# Altium PCB one.PcbDoc (part 2 of 2)
Units mil, origin at the board's own origin, x right, y up, seen from the top; angles counter-clockwise.
Board outline 6000 x 4000 mil, 4 copper layers (Top Layer, Layer 1, Layer 2, Bottom Layer), stack 23.756 mil thick; 90 components, 158 nets, 637 pads, 325 vias.
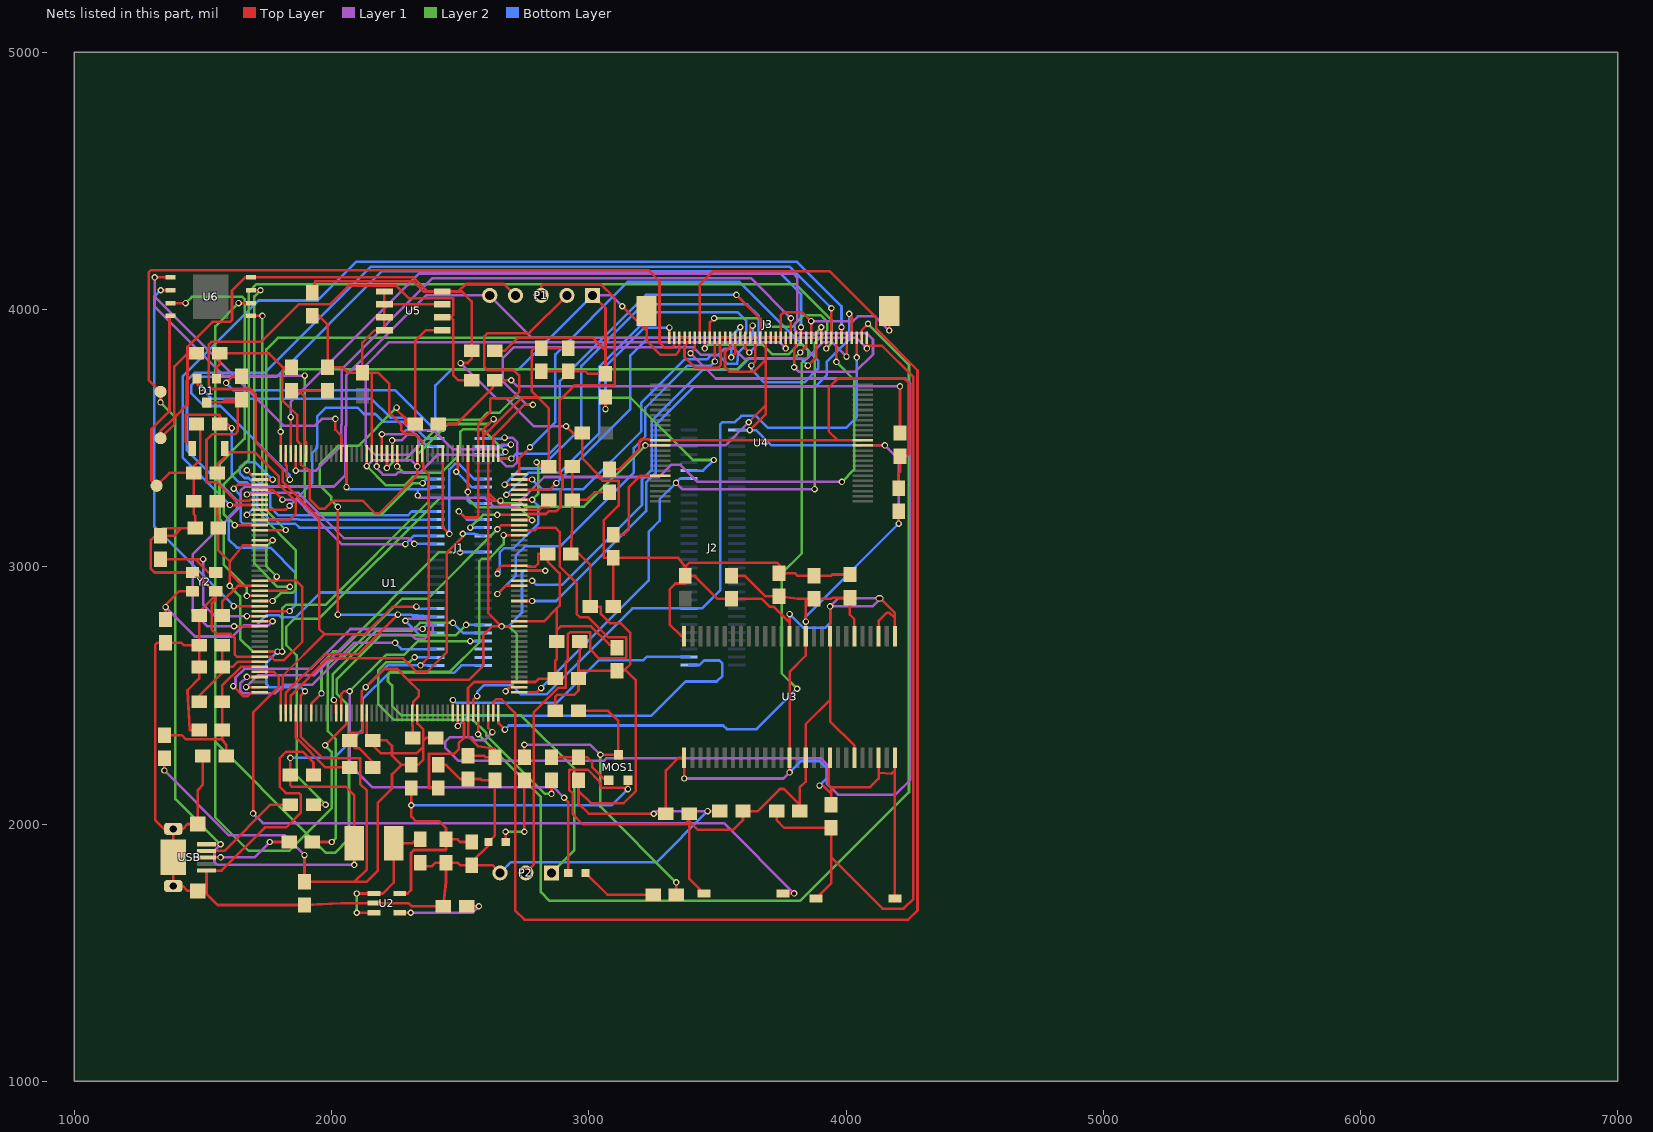
[diagram p4: the nets of this part, all layers, seen from the top]

## Via types
v1: diameter 25, hole 15, Top Layer to Bottom Layer, 325 vias

## Nets (pads, with @x,y where several pads share a name; then routed paths per layer and width w, separated by ;. In a path a pad name is that pad's centre, name@x,y a point inside that pad or via, vN(x,y) a via of type N, cw(c..) or ccw(c..) an arc to the next point about the centre after c; other vN are vias at no path point) (continued)
GND: C1.2 C2.1 C3.2 C4.1 C5.2 C6.1 C7.1 C8.1 C9.1 C10.1 C11.1 C12.2 C13.1 C14.1 C15.1 C16.1 C17.1 C18.1 C19.1 C20.1 C21.1 C22.1 C23.1 C24.1 C25.1 C26.1 C27.1 C28.1 C29.1 C30.1 C31.1 C32.1 C33.2 C34.2 C35.1 C36.1 C37.1 C38.1 C39.1 C40.1 C41.1 C42.1 C43.1 C44.2 C45.2 GND.1 J1.1 J1.30 J2.31 J3.3 J3.4 J3.5 J3.11 J3.12 J3.13 J3.20 J3.21 J3.22 J3.23 J3.29 J3.A J3.B P1.1 P2.3 PWR.2 R1.2 R4.2 R7.2 R14.1 RST.2 U1.14 U1.22 U1.37 U1.61 U1.71 U1.90 U1.102 U1.113 U1.126 U1.135 U1.148 U1.158 U2.2 U3.6 U3.12 U3.28 U3.41 U3.46 U3.52 U3.54 U4.13 U4.36 U5.1 U5.2 U5.3 U5.4 U5.7 U6.4 USB.5 USB.6 USB.7 USB.8 USB.9 Y2.2 Y2.4 | length 30651.5
  Top Layer w10: C11.1@1334.94,3120 1387,3120 1417,3150 ; U6.4@1373.5,3975 1370,3975 1370,3605 1300,3535 1300,3335 GND.1@1320,3315 1370,3365 C9.1@1465,3365 ; C8.1@1475,3554.94 1475,3550.22 1489,3550.22 1489,3412 1485,3412 1465,3392 C9.1@1465,3365 ; C7.1@1485,2365 1448,2365 1440,2520 1485,2565 C4.1@1485,2610.98 C2.1@1485,2695 ; C6.1@1500,2265 1500,2153 1480,2133 USB.9@1480,2000 1440.78,2000 1422,1981.22 USB.6@1384.65,1981.22 ; v1(1590,3715) 1615,3740 C1.2@1650,3740 ; U1.22@1720.91,2945.59 1771,2945.59 ; U1.14@1720.91,3103.07 1770.93,3103.07 v1(1771,3103) ; v1(1787,2961.59) 1771,2945.59 ; C44.2@1925,3975 1952,3975 1985,3942 R4.2@1985,3775 2042,3775 2062,3755 R7.2@2120,3755 ; C33.2@1930,2190 1930,2239 1888,2281 1824,2281 1799,2256 1799,2144 1823,2120 1873,2120 1881,2112 1881,2044 1824,1987 1741,1987 1572.82,1818.82 USB.5@1514,1818.82 1514,1740 ; U1.158@2156.56,3440.29 2156.56,3754.44 2156,3755 ; R1.2@2160,2220 2160,2241.97 2108,2293.96 2093.04,2293.96 2070,2317 C16.1@2070,2325 2070,2355 2119,2355 2120.87,2356.87 2120.87,2399 2117.19,2399 U1.61@2117.19,2431.2 2117.19,2516 v1(2133.19,2532) 2203.69,2602.5 2256,2602.5 2297.9,2560.6 ; U5.1@2205.59,4070 U5.2@2205.59,4020 ; C17.1@2315,2335 2315,2382 2314.04,2382.96 U1.71@2314.04,2431.2 2314.04,2460 2317,2460 2317,2474.68 2338.5,2496.18 2338.5,2520 2297.9,2560.6 ; C29.1@2345,1850 2345,1836.5 2390.66,1836.5 2404.16,1850 C31.1@2445,1850 ; v1(2346,2616.54) 2378,2648.54 2378,3359.38 2357.38,3380 2357.38,3400.62 2353.41,3404.59 U1.148@2353.41,3440.29 2353.41,3484.59 2322,3516 2286,3516 2271.45,3530.55 2271.45,3552 2224,3599.45 2224,3712 2181,3755 2156,3755 ; C3.2@2415.06,2230 2445,2230 2500,2175 C18.1@2530.06,2175 2580,2175 2585,2170 C19.1@2635,2170 2635,1955 PWR.2@2610,1930 2610,1917 2545,1852 C32.1@2545,1840 ; U5.7@2430,4020 U5.2@2205.59,4020 ; U1.135@2609.31,3440.29 2609.31,3287.55 ; C45.2@2635,3840 2674,3840 2725,3891 3013.94,3891 3064.94,3840 ; v1@2648.43,3248.43 2656,3240.87 ; P2.3@2655,1810 2625,1840 C32.1@2545,1840 ; 2657,3240.87 U1.126@2730,3240.87 ; v1(2657,3257) 2639.87,3257 ; v1(2677,2516) 2693.2,2532.2 U1.90@2730,2532.2 ; U1.102@2730,2768.42 v1(2661.12,2768.42) ; U1.113@2730,2984.96 2757.48,2984.96 2757.94,2984.5 v1(2831,2984.5) ; C25.1@2815.06,3760 C24.1@2920,3760 2987,3760 2997,3750 C28.1@3064.94,3750 3064.94,3840 ; C34.2@2870,2440 2870,2495 2878,2503 2944,2503 2960,2519 C20.1@2960,2565 2960,2595 ; C23.1@2935,3390.06 C5.2@2935,3260 ; R14.1@2960,2170 2960,2129 ; C21.1@2965,2710.06 2965,2640 2960,2635 2960,2595 ; P1.1@3015,4055 3064.94,4005.06 3064.94,3840 ; C36.1@3080,3289.37 3021.37,3289.37 2992,3260 C5.2@2935,3260 ; v1(3130,4013) 3224.61,3918.39 ; v1(3220,3472) 3220.43,3471.57 U4.13@3277.6,3471.57 ; J3.A@3224.61,3994.43 3224.61,3918.39 ; v1(3371.06,2177) U3.28@3371.06,2257.56 3349.56,2257.56 3300,2208 C38.1@3300,2040 v1(3252.5,2040) 3000,2040 2960,2080 2960,2129 ; v1(3462,2050) C37.1@3509.53,2050 ; C40.1@3555,2965 3607,2965 3687,2885 C41.1@3740.04,2885 3812,2875 3844,2875 ; v1(3622,3562) 3687.2,3627.2 ; v1(3626,3531.46) 3687.2,3592.66 3687.2,3627.2 ; v1(3780.51,2200.69) U3.41@3780.51,2257.56 3780.51,2591.51 3843.5,2654.5 U3.12@3843.5,2730 3843.5,2875 ; v1(3844,2787) 3844,2875 ; J3.29@3864.37,3890 v1(3864.37,3955) 3829.87,3989.5 3759.63,3989.5 3746.26,3976.13 J3.23@3746.26,3890 J3.22@3726.57,3890 J3.21@3706.89,3890 J3.20@3687.2,3890 3687.2,3803.41 ; v1(3897,2149) 3911.09,2149 3942.09,2118 ; U3.46@3937.99,2257.56 3937.99,2222.09 3932.89,2222.09 3932.89,2152.29 ; C12.2@3942.09,2075 3942.09,2118 ; U3.6@4032.48,2730 4032.48,2796 4015.06,2813.42 C43.1@4015.06,2880 3947,2880 3942,2875 C42.1@3875,2875 3844,2875 ; U4.36@4065,3471.57 v1(4151,3471.57) ; U3.52@4126.97,2257.56 4126.97,2198.83 ; v1(4168,3918.49) 4168.49,3918.97 J3.B@4168.49,3994.43 ; RST.2@4190,1710 4189.96,2208 ; U3.54@4189.96,2257.56 4189.96,2208 ; v1(4205,3168) C35.1@4205,3215 ; USB.6@1384.65,1981.22 1348.78,1981.22 1314,2016 1314,2696 1323,2705 C10.1@1355,2705 1415,2705 1425,2695 C2.1@1485,2695 ; USB.6@1384.65,1981.22 1384.65,1925.35 1385,1925 USB.9@1385,1870 1385,1814.35 1384.65,1814 USB.7@1384.65,1758.78 1422,1758.78 1440.78,1740 USB.8@1480,1740 1514,1740 ; 1417,3150 C14.1@1470,3150 1470,3199 1464.94,3204.06 C13.1@1464.94,3254.94 1464.94,3309 1465,3309.06 C9.1@1465,3365 ; 1417,3150 1344,3150 1298,3104 1298,2991.83 1312,2977.83 Y2.4@1459.45,2977.83 1468,2977.83 1540.83,2905 Y2.2@1550,2905 Y2.2@1550,2890 ; C2.1@1485,2695 C15.1@1485,2810 1485,2825 Y2.2@1550,2890 ; 1514,1740 1514,1728 1557,1685 C27.1@1895,1685 2037.4,1692.4 U2.2@2165,1692.4 2300,1692.4 2312.4,1680 C30.1@2435,1680 2445,1775 C31.1@2445,1850 ; Y2.2@1550,2890 1550,2872 1534,2856 1534,2757 1552,2739 1608,2739 1623.65,2723.35 1623.65,2658.54 1632,2650.18 1674.37,2650.18 1674.5,2650.31 U1.37@1720.91,2650.31 1765,2650.31 1779.31,2636 1814,2636 1886.5,2708.5 1886.5,2920.93 1859.28,2948.15 1787.45,2946.07 1771,2945.59 ; R7.2@2120,3755 2156,3755 ; R7.2@2120,3755 2120,3872 2168,3920 U5.4@2205.59,3920 U5.3@2205.59,3970 U5.2@2205.59,4020 ; 2297.9,2560.6 2533.6,2560.6 2590,2617 2590,2734.42 2624,2768.42 v1(2661.12,2768.42) ; C31.1@2445,1850 2490,1850 2500,1840 C32.1@2545,1840 ; 2609.31,3271.69 2609.31,3287.55 ; 2609.31,3271.69 2609.31,2820.24 v1(2661.12,2768.42) ; 2609.31,3271.69 2624,3257 2639.87,3257 ; 2609.31,3287.55 2639.87,3257 ; C5.2@2935,3260 2935,3160 C22.1@2930,3050 2963,3050 3005,3008 C39.1@3005,2845 3047.17,2845 3047.17,2816 3082.17,2781 3123,2781 3162,2742 3162,2621 3141.5,2600.5 ; 2960,2129 3008,2081 3136,2081 3182,2127 3182,2560 3141.5,2600.5 ; 2960,2595 C26.1@3110,2595 ; C26.1@3110,2595 3135.23,2599.41 3141.5,2600.5 ; C26.1@3110,2595 3136,2595 3141.5,2600.5 ; 3224.61,3918.39 3224.61,3879.07 3279.67,3824 3336.56,3824 3352.56,3840 J3.3@3352.56,3890 J3.4@3372.24,3890 J3.5@3391.93,3890 3391.93,3871 3384,3871 3372.11,3859.11 3372.11,3815.89 3413.52,3774.48 3504.34,3774.48 3513.85,3784 3513.85,3833.18 3510.04,3837 J3.11@3510.04,3890 J3.12@3529.72,3890 J3.13@3549.41,3890 3549.41,3855.47 3529.59,3835.66 3529.59,3776 3547.11,3758.48 3642.28,3758.48 3687.2,3803.41 ; 3687.2,3627.2 3687.2,3803.41 ; 3932.89,2152.29 3932.89,2152 3941.8,2143.09 3942.09,2143.09 ; 3932.89,2152.29 3942.09,2143.09 ; 3942.09,2118 3942.09,2143.09 ; 3942.09,2143.09 4094.06,2143.09 4126.97,2176 4126.97,2198.83 ; 4126.97,2198.83 4177.71,2195.75 4189.96,2208
  Layer 1 w10: P1.1@3015,4055 3088,4055 v1(3130,4013) ; v1(3220,3472) 3532,3472 v1(3622,3562) ; v1(3252.5,2040) 3262.5,2050 v1(3462,2050) ; v1(3371.06,2177) 3756.82,2177 v1(3780.51,2200.69) ; v1(3864.37,3955) 4028,3955 4046.57,3973.57 4112.92,3973.57 v1(4168,3918.49) ; v1(4151,3471.57) 4205,3417.57 v1(4205,3168)
  Layer 2 w10: v1(1771,3103) 1747,3079 1747,3001.59 v1(1787,2961.59) ; v1(2657,3257) 2667,3247 2737.44,3247 2750.44,3234 2982,3234 v1(3220,3472) ; v1(2661.12,2768.42) 2689.58,2768.42 2720,2738 2720,2559 v1(2677,2516)
  Bottom Layer w10: v1(1590,3715) 1619,3686 2247.92,3686 J1.30@2404,3529.92 ; v1(2133.19,2532) 2217.72,2616.54 v1(2346,2616.54) J1.1@2404.96,2616.54 ; J1.30@2404.96,3529.92 J1.30@2404,3529.92 ; P2.3@2655,1810 2696,1851 3263,1851 v1(3462,2050) ; v1(2661.12,2768.42) 2687.42,2768.42 2740.5,2821.5 2740.5,2976 2749.59,2985.09 2830.41,2985.09 v1(2831,2984.5) ; P1.1@3015,4055 2728.5,3768.5 2467.5,3768.5 2404,3705 J1.30@2404,3529.92 ; J2.31@3575.04,3531.46 v1(3626,3531.46) 3650,3531.46 3709.88,3471.57 v1(4151,3471.57) ; v1(3780.51,2200.69) 3824.82,2245 3897,2245 3925,2217 3925,2177 v1(3897,2149) ; v1(3844,2787) 3844,2807 v1(4205,3168)
IIC_SCL: J1.8 R20.1 U1.45 U5.6 | length 3744.1
  Top Layer w10: U1.45@1802.22,2431.2 1802.22,2517.21 1810.39,2525.37 1810.39,2576.31 1972.08,2738 ; v1(2330,2845) 2238,2845 2131,2738 1972.08,2738 ; U5.6@2430,3970 2464,3970 ; R20.1@2545,3725 2493,3725 2474,3744 2474,3960 2464,3970 ; 1972.08,2738 1952,2758.08 1952,3187.59 1810.5,3329.09 1810.5,3378.68 1705,3484.18 1705,3670 1683.95,3691.05 1535.95,3691.05 1523,3704 1523,3864 1533,3874 1726,3874 1872,4020 1993.5,4020 2067,4093.5 2250,4093.5 2299.5,4044 2474,4044 2474,3980 2464,3970
  Bottom Layer w10: v1(2330,2845) 2337.99,2837.01 J1.8@2404.96,2837.01
IIC_SDA: J1.7 R21.1 U1.46 U5.5 | length 2682.5
  Top Layer w10: U1.46@1821.91,2431.2 1821.91,2509.46 1972.08,2659.63 2103.63,2659.63 v1(2258.02,2814.02) ; v1(2025,2814.02) v1(2025,3233) ; v1(2253,3619) 2253,3610.45 2287.45,3576 2287.45,3555 R21.1@2325,3555 2325,3877 2368,3920 U5.5@2430,3920
  Layer 2 w10: v1(2025,3233) 1999.64,3258.36 1999.64,3271.64 1955,3316.28 1955,3399 2026,3470 2104,3470 v1(2253,3619)
  Bottom Layer w10: v1(2025,2814.02) v1(2258.02,2814.02) 2310.6,2814.02 ; 2310.6,2814.02 J1.7@2404.96,2805.51 2319.11,2805.51 2310.6,2814.02
JTCK: J1.42 P1.2 U1.137 | length 1512.1
  Top Layer w10: v1(2495,3215) 2518.54,3191.46 2563.75,3191.46 2569.94,3197.65 U1.137@2569.94,3440.29 2569.94,3554.94 2617,3602 2617,3652.11 2620.39,3655.5 2704.6,3655.5 2729.1,3680 2729.1,3744 2708.1,3765 2605,3765 2594,3776 2594,3896 2606,3908 2768,3908 P1.2@2915,4055
  Bottom Layer w10: v1(2495,3215) 2526.53,3183.47 J1.42@2590,3183.47
JTMS: J1.43 P1.3 U1.124 | length 1782.3
  Top Layer w10: v1(2644.5,3201.5) U1.124@2730,3201.5 2757,3201.5 2760.5,3205 2833.69,3205 2844.69,3216 2874,3216 2890,3232 2890,3297 2898,3305 2898,3353 2888,3363 2888,3649 2944,3705 3101,3705 3101,4044 3046,4099 2824,4099 2815,4090 P1.3@2815,4055
  Layer 2 w10: v1(2539,3152) 2588.5,3201.5 v1(2644.5,3201.5)
  Bottom Layer w10: v1(2539,3152) J1.43@2590,3151.97
KEY0: J1.6 U1.44 | length 1025.9
  Top Layer w10: v1(1618,2536) 1658,2496 1674,2496 1690.52,2512.52 U1.44@1720.91,2512.52
  Layer 1 w10: v1(1618,2536) 1626.75,2544.75 1626.75,2568.75 1661,2603 1918,2603 2073.02,2758.02 v1(2354,2758.02)
  Bottom Layer w10: v1(2354,2758.02) 2370,2774.02 J1.6@2404.96,2774.02
KEY1: J1.5 U1.43 | length 1173.4
  Top Layer w10: v1(1668,2532) 1668.2,2532.2 U1.43@1720.91,2532.2
  Layer 1 w10: v1(1668,2532) 1715,2579 1932.89,2579 2089.39,2735.5 2310.5,2735.5 2326.5,2719.5 2361.5,2719.5 2394,2752 2394,2772 2368,2798 2295,2798 v1(2287,2790)
  Bottom Layer w10: v1(2287,2790) 2342.48,2734.52 2377.5,2734.52 2377.5,2742.52 J1.5@2404.96,2742.52
KEY2: J1.28 U1.8 | length 1049.7
  Top Layer w10: U1.8@1720.91,3221.18 1821.18,3221.18 v1(1837,3237)
  Bottom Layer w10: v1(1837,3237) 1925,3325 1925,3443 1944,3462 1944,3584 1979,3619 2100.45,3619 2125.45,3594 2171,3594 2201.34,3563.66 2277.88,3563.66 2365.68,3475.86 J1.28@2404.96,3466.93
LCD_B3: J3.24 U1.154 | length 2468.7
  Top Layer w10: U1.154@2235.3,3440.29 v1(2235.3,3491) ; J3.24@3765.94,3890 3765.94,3849.06 v1(3766,3849)
  Layer 1 w10: v1(2235.3,3491) 2272,3491 2295,3514 2328,3514 2338,3504 2338,3469 2304,3435 2170,3435 2133,3472 2133,3782.87 2223.13,3873 3742,3873 v1(3766,3849)
LCD_B4: J3.25 U1.173 | length 2614.8
  Top Layer w10: v1(1861,3374) 1861.28,3374.28 U1.173@1861.28,3440.29 ; J3.25@3785.63,3890 3785.63,3965.63 v1(3786,3966)
  Layer 1 w10: v1(1861,3374) 1940,3374 2038.32,3472.32 2038.32,3551.5 2040.5,3553.68 2040.5,3769.5 2393,4122 3630,4122 v1(3786,3966)
LCD_B5: J3.26 U1.174 | length 3426.1
  Top Layer w10: U1.174@1841.6,3440.29 v1(1841.6,3582) ; v1(3798.5,3775.81) 3798.5,3849.69 3805.31,3856.5 J3.26@3805.31,3890
  Layer 1 w10: v1(1841.6,3582) 1841.6,3641.64 2339.92,4139.97 3795.03,4139.97 3810,4125 3810,3954 3801,3945 3801,3920 3814,3907 4081,3907 4105,3883 4105,3826 4037.48,3758.48 3815.83,3758.48 v1(3798.5,3775.81)
LCD_B6: J3.27 U1.175 | length 3431.6
  Top Layer w10: U1.175@1821.91,3440.29 1821.91,3396.48 1826.5,3391.89 1826.5,3350.5 v1(1837.91,3339.09) ; J3.27@3825,3890 v1(3825,3931)
  Bottom Layer w10: v1(1837.91,3339.09) 1837.91,3355.09 1568,3625 1504,3625 1454,3675 1454,3704.57 1487.93,3738.5 1785.5,3738.5 2195,4148 3738.06,4148 3825,4061.06 v1(3825,3931)
LCD_B7: J3.28 U1.176 | length 2426.7
  Top Layer w10: U1.176@1802.22,3440.29 v1(1802.22,3525) ; v1(3822,3833) 3844.68,3855.68 J3.28@3844.68,3890
  Layer 2 w10: v1(1802.22,3525) 1802.22,3744 1826.72,3768.5 3578.52,3768.5 3619.52,3809.5 3798.5,3809.5 v1(3822,3833)
LCD_BL: J1.23 J3.34 U1.163 | length 2913
  Top Layer w10: v1(2058.13,3309.45) U1.163@2058.13,3440.29 ; v1(3962.79,3796.21) J3.34@3962.79,3890
  Layer 1 w10: v1(2335,3277) 2344.5,3267.5 2597.5,3267.5 2632,3233 2711,3233 2827,3349 3272.5,3349 3320,3396.5 3357,3396.5 3423.5,3330 v1(3984,3330)
  Layer 2 w10: v1(3962.79,3796.21) 4032,3727 4032,3378 v1(3984,3330)
  Bottom Layer w10: v1(2058.13,3309.45) 2066.08,3301.5 2335,3301.5 ; v1(2335,3277) 2335,3301.5 ; 2335,3301.5 2377.5,3301.5 ; 2377.5,3301.5 2377.5,3309.45 J1.23@2404.96,3309.45 2377.5,3301.5
LCD_CLK: J3.30 U1.111 | length 1793.6
  Top Layer w10: U1.111@2730,2945.59 v1(2780,2945.59) ; v1(3852,3782) 3884.05,3814.05 J3.30@3884.05,3890
  Bottom Layer w10: v1(2780,2945.59) 2796,2929.59 2896,2929.59 3206.92,3240.51 3206.92,3338.59 3244.33,3376 3244.33,3566.59 3443.75,3766 3579.73,3766 3621.73,3808 3826,3808 v1(3852,3782)
LCD_DE: J3.33 U1.28 | length 4169.6
  Top Layer w10: U1.28@1720.91,2827.48 1836.48,2827.48 v1(1837,2828) ; J3.33@3943.11,3890 v1(3943.11,4005)
  Bottom Layer w10: v1(1837,2828) 1861.5,2852.5 1861.5,2974.5 1762,3074 1632,3074 1600,3106 1600,3194 1631,3225 1631,3259 1438,3452 1438,3724 1468.5,3754.5 1740.53,3754.5 2152.03,4166 3782.11,4166 v1(3943.11,4005)
LCD_G2: J3.14 U1.128 | length 1690.1
  Top Layer w10: v1(2680,3280) 2680.24,3280.24 U1.128@2730,3280.24 ; v1(3554,3814) 3569.09,3829.09 J3.14@3569.09,3890
  Bottom Layer w10: v1(2680,3280) 2765,3365 2885.34,3365 3041,3520.66 3041,3778 3253,3990 3578,3990 3613,3955 3613,3908 3554,3849 v1(3554,3814)
LCD_G3: J3.15 U1.129 | length 1283.3
  Top Layer w10: U1.129@2730,3299.92 2849,3299.92 v1(2874.08,3325) ; J3.15@3588.78,3890 v1(3588.78,3931)
  Bottom Layer w10: v1(2874.08,3325) 3162,3612.92 3162,3821.39 3230.61,3890 3547.78,3890 v1(3588.78,3931)
LCD_G4: J3.16 U1.130 | length 1714.5
  Top Layer w10: v1(2673,3319.61) U1.130@2730,3319.61 ; J3.16@3608.46,3890 3608.46,3848.54 v1(3624,3833)
  Bottom Layer w10: v1(2673,3319.61) 2735.39,3382 2811,3382 2971,3542 2971,3781 3210,4020 3616,4020 3661,3975 3661,3870 v1(3624,3833)
LCD_G5: J3.17 U1.131 | length 1380.5
  Top Layer w10: U1.131@2730,3339.29 v1(2780,3339.29) ; J3.17@3628.15,3890 3628.15,3928.59 v1(3637,3937.44)
  Bottom Layer w10: v1(2780,3339.29) 2817.79,3301.5 2979,3301.5 3204.33,3526.84 3204.33,3637.96 3372.37,3806 3459,3806 3476,3823 3504,3823 3537,3790 3578,3790 3580.36,3831.36 3637,3888 v1(3637,3937.44)
LCD_G6: J3.18 U1.132 | length 2253.1
  Top Layer w10: U1.132@2730,3358.98 2730,3423.02 v1(2771.49,3464.51) ; v1(3632,3782) 3647.83,3797.83 J3.18@3647.83,3890
  Bottom Layer w10: v1(2771.49,3464.51) 2870,3563.02 2870,3826 3151,4107 3586,4107 3892,3801 3892,3770 3840,3718 3680,3718 3632,3766 v1(3632,3782)
LCD_G7: J3.19 U1.133 | length 1555
  Top Layer w10: U1.133@2648.68,3440.29 2648.68,3421 v1(2699,3421) ; v1(3574,4057) 3667.52,3963.48 J3.19@3667.52,3890
  Bottom Layer w10: v1(2699,3421) 2717,3439 2845,3439 2888,3482 2888,3723 3222,4057 v1(3574,4057)
LCD_HSYNC: J3.31 U1.12 | length 3068.1
  Top Layer w10: U1.12@1720.91,3142.44 1821.44,3142.44 v1(1822,3143) ; J3.31@3903.74,3890 3903.74,3930.74 v1(3904,3931)
  Layer 2 w10: v1(1822,3143) 1747,3218 1747,3845 1792,3890 3863,3890 v1(3904,3931)
LCD_R3: J3.6 U1.86 | length 4783.1
  Top Layer w10: U1.86@2609.31,2431.2 2609.31,2373 v1(2625.31,2357) ; v1(3395.61,3830) 3411.61,3846 J3.6@3411.61,3890
  Layer 1 w10: v1(2625.31,2357) 2593.81,2325.5 2558.58,2325.5 2546.44,2337.64 2460.1,2337.64 2442.45,2320 2442.45,2296 2492.74,2245.71 3058.71,2245.71 3069.19,2256.19 3901.81,2256.19 3925,2233 3925,2157 3968,2114 4192,2114 4250,2172 4250,3712 4230,3732 3493.61,3732 v1(3395.61,3830)
LCD_R4: J3.7 U1.87 | length 5874.6
  Top Layer w10: U1.87@2629,2431.2 2629,2474 2640,2485 2661,2485 2714,2432 2714,1664 2750,1628 4242,1628 4278,1664 4278,3764 4118,3924 4118,3967 3937,4148 3483.3,4148 3431.3,4096 J3.7@3431.3,3890
LCD_R5: J3.8 U1.88 | length 3163
  Top Layer w10: U1.88@2648.68,2431.2 2648.68,2392 v1(2673.68,2367) ; v1(3451,3849) J3.8@3450.98,3890
  Layer 2 w10: v1(3451,3849) 3466,3864 3675.5,3864 3714,3825.5 3776,3825.5 3814.5,3864 3830.5,3864 3854,3840.5 3854,3817.5 3828.5,3792 3828.5,3052.5 3750,2974 3750,2586 v1(3810,2526)
  Bottom Layer w10: v1(2673.68,2367) 2689.68,2383 3522.04,2383 3536.54,2368.5 3652.5,2368.5 v1(3810,2526)
LCD_R6: J2.24 J3.9 U1.89 | length 2949.9
  Top Layer w10: U1.89@2730,2512.52 2799,2512.52 v1(2815,2528.52) ; J3.9@3470.67,3890 3470.67,3949.67 v1(3487,3966)
  Layer 1 w10: v1(3339,3326) 3363,3302 v1(3878,3302)
  Layer 2 w10: v1(3487,3966) 3661,3966 3694,3933 3792,3933 3837.5,3978.5 3900.5,3978.5 3927.5,3951.5 3927.5,3920 3878,3870.5 v1(3878,3302)
  Bottom Layer w10: v1(2815,2528.52) 3232.64,2946.16 3232.64,3136 3276,3179.36 3276,3263 v1(3339,3326) 3355.48,3342.48 J2.24@3390,3342.48
LCD_R7: J3.10 U1.110 | length 1576.5
  Top Layer w10: v1(2645,2894) 2676.91,2925.91 U1.110@2730,2925.91 ; v1(3490.35,3798) J3.10@3490.35,3890
  Bottom Layer w10: v1(2645,2894) 2716,2965 2716,3043 2752,3079 2887.38,3079 3175.39,3367.01 3175.39,3462.39 3220.33,3507.33 3220.33,3618.17 3384.17,3782 3474.35,3782 v1(3490.35,3798)
LCD_VSYNC: J3.32 U1.11 | length 3557.5
  Top Layer w10: v1(1624,3162.13) U1.11@1720.91,3162.13 ; v1(3923.42,3848.5) J3.32@3923.42,3890
  Layer 2 w10: v1(1624,3162.13) 1580.5,3205.63 1580.5,3319.5 1678.5,3417.5 1678.5,4068.5 1709,4099 3803,4099 3943.5,3958.5 3943.5,3868.58 v1(3923.42,3848.5)
LED0: DS0.2 J1.57 U1.57 | length 2182.5
  Top Layer w10: U1.57@2038.45,2431.2 2038.45,2506.52 2048,2516.08 v1(2070.45,2516.08) ; v1(2904,2102) 2920,2086 DS0.2@2920,1810
  Layer 1 w10: v1(2070.45,2516.08) 2070.45,2230.55 2158,2143 2863,2143 v1(2904,2102)
  Layer 2 w10: v1(2070.45,2516.08) 2211.94,2657.57 2282.5,2657.57 2335.95,2711.02 v1(2539,2711.02)
  Bottom Layer w10: v1(2539,2711.02) J1.57@2590,2711.02
LED1: J1.56 U1.56 | length 845.2
  Top Layer w10: v1(2009,2482) 2009,2475 2016,2475 2016,2433.96 U1.56@2018.76,2431.2
  Layer 2 w10: v1(2009,2482) 2004.5,2486.5 2004.5,2581.5 2174.5,2751.5 2313.5,2751.5 2344,2782 v1(2472,2782)
  Bottom Layer w10: v1(2472,2782) 2511.48,2742.52 J1.56@2590,2742.52
NetC1_1: C1.1 D1.3 U1.6 | length 842.9
  Top Layer w10: D1.3@1515,3638.74 1576,3638.74 ; C1.1@1650,3650 1587.26,3650 1576,3638.74 ; U1.6@1720.91,3260.55 1683.55,3260.55 1679.74,3256.74 1626.08,3256.74 1553.82,3329 1514,3329 1514,3493 1536,3515 1624,3515 1636,3527 1636,3626.74 1624,3638.74 1576,3638.74
NetC2_2: C2.2 C4.2 R2.1 U1.38 | length 411.3
  Top Layer w10: R2.1@1485,2475 1485,2497 1575,2587 C4.2@1575,2610.98 ; C2.2@1575,2695 C4.2@1575,2610.98 ; U1.38@1720.91,2630.63 1634.98,2630.63 1615.33,2610.98 C4.2@1575,2610.98
NetC3_1: C3.1 U1.81 | length 442.7
  Top Layer w10: C3.1@2415.06,2140 2379,2140 2379,2273 2477,2273 2494,2290 2494,2314 2515,2335 2515,2394 2510.89,2398.11 U1.81@2510.89,2431.2
NetC5_1: C5.1 U1.125 | length 147.5
  Top Layer w10: U1.125@2730,3221.18 2807.55,3221.18 2818.37,3232 2845,3232 C5.1@2845,3260
NetC8_2: C8.2 U1.9 Y1.1 | length 831.9
  Top Layer w10: Y1.1@1459.02,3460 1459.02,3461.97 1434,3486.98 1434,3591 1560,3591 ; C8.2@1565,3554.94 1565,3586 ; v1(1612,3539) 1565,3586 ; v1(1671,3201.5) U1.9@1720.91,3201.5 ; 1560,3591 1565,3586 ; 1560,3591 1565,3591 1565,3586
  Bottom Layer w10: v1(1612,3539) 1612,3356 1640.5,3327.5 1671.5,3327.5 1695,3304 1695,3225.5 v1(1671,3201.5)
NetC9_2: C9.2 U1.10 Y1.2 | length 678.9
  Top Layer w10: C9.2@1555,3365 1555,3397 1585,3427 Y1.2@1585,3445 ; Y1.2@1585,3460 Y1.2@1585,3445 ; U1.10@1720.91,3181.81 1835.81,3181.81 1861.28,3207.28 1861.28,3254.31 1794.5,3321.09 1794.5,3352.29 1701.79,3445 Y1.2@1585,3445
NetC10_2: C10.2 U1.30 Y2.1 | length 721.2
  Top Layer w10: C10.2@1355,2795 v1(1355,2843) 1355,2852 1408,2905 Y2.1@1459.45,2905 ; U1.30@1720.91,2788.11 1770.89,2788.11 v1(1771,2788)
  Layer 1 w10: v1(1355,2843) 1469,2729 1615,2729 1658.25,2772.25 1755.25,2772.25 v1(1771,2788)
NetC11_2: C11.2 U1.29 Y2.3 | length 683.3
  Top Layer w10: C11.2@1334.94,3030 1470,3030 ; v1(1501,3030) 1470,3030 ; Y2.3@1550,2977.83 1522.17,2977.83 1470,3030 ; v1(1671,2808) 1671.21,2807.79 U1.29@1720.91,2807.79
  Layer 1 w10: v1(1501,3030) 1501,2853 1546,2808 v1(1671,2808)
NetC28_2: C28.2 J3.1 | length 563.8
  Top Layer w10: v1(3064.94,3613) C28.2@3064.94,3660 ; J3.1@3313.19,3890 v1(3313.19,3930)
  Bottom Layer w10: v1(3064.94,3613) 3064.94,3778.94 3216,3930 v1(3313.19,3930)
NetC29_2: C29.2 F1.2 U2.1 U2.3 | length 565.7
  Top Layer w10: v1(2098,1655) U2.3@2165,1655 ; v1(2098,1729.8) U2.1@2165,1729.8 2200,1729.8 2241.77,1771.58 F1.2@2241.77,1925 2312.95,1925 2327.95,1940 C29.2@2345,1940
  Layer 2 w10: v1(2098,1655) v1(2098,1729.8)
NetC30_2: C30.2 U2.4 | length 366.4
  Top Layer w10: U2.4@2265,1655 v1(2308,1655) ; C30.2@2525,1680 v1(2573,1680)
  Layer 1 w10: v1(2308,1655) 2548,1655 v1(2573,1680)
NetC35_2: C35.2 C36.2 R16.1 U4.12 U4.37 | length 2049.6
  Top Layer w10: C36.2@3080,3379.37 3120,3379.37 3196,3455.37 3196,3488 3204,3496 3233.26,3496 3238,3491.26 U4.12@3277.6,3491.26 3968,3491.26 ; U4.37@4065,3491.26 3968,3491.26 ; C35.2@4205,3305 4205,3365 4210,3370 R16.1@4210,3430 4236,3430 4246,3440 4246,3712 4226,3732 3968,3732 3933,3697 3933,3526.26 3968,3491.26
NetDS0_1: DS0.1 R10.2 | length 298.3
  Top Layer w10: DS0.1@2986.93,1810 3071.93,1725 R10.2@3250,1725
NetMOS1_1: MOS1.1 R13.2 R14.2 | length 270.2
  Top Layer w10: R13.2@2855,2260 R14.2@2960,2260 2993,2260 3013,2240 3013,2221.79 3064,2170.79 MOS1.1@3077.6,2170.79
NetPWR_1: PWR.1 R15.1 | length 313.1
  Top Layer w10: PWR.1@2676.93,1930 v1(2676.93,1970) ; v1(2750,1970) R15.1@2750,2170
  Layer 2 w10: v1(2676.93,1970) v1(2750,1970)
NetR1_1: R1.1 U1.48 | length 352
  Top Layer w10: U1.48@1861.28,2431.2 1861.28,2336 1977.28,2220 R1.1@2070,2220
NetR4_1: R4.1 R5.1 U1.171 | length 396.5
  Top Layer w10: R5.1@1844.94,3685 1872.28,3685 ; U1.171@1900.65,3440.29 1900.65,3484.52 1893.28,3491.89 1893.28,3664 1872.28,3685 ; R4.1@1985,3685 1872.28,3685
NetR11_2: R11.2 USB.3 | length 345.9
  Top Layer w10: USB.3@1514,1870 v1(1569,1870) ; v1(1760,1930) R11.2@1835,1930
  Layer 1 w10: v1(1569,1870) 1700,1870 v1(1760,1930)
NetR12_2: R12.2 USB.2 | length 400.3
  Top Layer w10: USB.2@1514,1895.59 1583.05,1895.59 1762.46,2075 R12.2@1840,2075
NetR18_1: R18.1 U4.19 | length 373.6
  Top Layer w10: R18.1@3095,3125 3136,3125 3156,3145 3156,3309.46 3200,3353.46 U4.19@3277.6,3353.46
NRF_CE: J2.25 U1.155 | length 1654.1
  Top Layer w10: v1(2215,3383.83) 2215.61,3384.44 U1.155@2215.61,3440.29
  Layer 2 w10: v1(2215,3383.83) 2245.17,3414 2284.54,3414 2441.54,3571 2579,3571 2607,3599 2654,3599 2712,3657 3163,3657 3405,3415 v1(3486,3415)
  Bottom Layer w10: J2.25@3390,3373.98 3444.98,3373.98 v1(3486,3415)
NRF_CS: J1.34 U1.153 | length 728.3
  Top Layer w10: v1(2255,3390) U1.153@2254.98,3440.29
  Layer 2 w10: v1(2255,3390) 2279,3366 2428,3366 2500,3438 2500,3523 2512,3535 2587.43,3535 v1(2676,3446.43)
  Bottom Layer w10: J1.34@2590,3435.43 2665,3435.43 v1(2676,3446.43)
PA0: U1.40 WKUP.1 | length 2929
  Top Layer w10: v1(1695,2041) 1695,2432.61 1794.39,2532 1794.39,2572.87 1776,2591.26 U1.40@1720.91,2591.26 ; WKUP.1@3755,1730 v1(3798,1730)
  Layer 1 w10: v1(1695,2041) 1733,2003 3525,2003 v1(3798,1730)
PA1: J1.3 U1.41 | length 970.1
  Top Layer w10: v1(1671,2572) 1671.43,2571.57 U1.41@1720.91,2571.57
  Layer 1 w10: v1(1671,2572) 1644.5,2545.5 1644.5,2519.5 1656,2508 1780,2508 1813,2541 1924.06,2541 2087.06,2704 v1(2247,2704)
  Bottom Layer w10: v1(2247,2704) 2271.47,2679.53 J1.3@2404.96,2679.53
PA3: J1.44 U1.47 | length 1353.9
  Top Layer w10: U1.47@1841.6,2431.2 1841.6,2500.3 1984.93,2643.63 2278.37,2643.63 2329.4,2592.6 2372.1,2592.6 2448,2668.5 2448,3055.7 2510.24,3117.95 v1(2510.24,3128.48)
  Bottom Layer w10: v1(2510.24,3128.48) 2554.5,3128.48 J1.44@2590,3120.47
PA5: J1.46 U1.51 | length 1018.2
  Top Layer w10: U1.51@1920.34,2431.2 1920.34,2467 v1(1961,2507.66)
  Layer 2 w10: v1(1961,2507.66) 1961,2624 2007.75,2670.75 2032.43,2670.75 2418.68,3057 v1(2500,3057)
  Bottom Layer w10: v1(2500,3057) 2500.48,3057.48 J1.46@2590,3057.48
PA9: P2.1 U1.120 | length 2320.9
  Top Layer w10: v1(2669,3123) 2669.24,3122.76 U1.120@2730,3122.76
  Layer 2 w10: v1(2669,3123) 2669,3088 2612.22,3031.22 2584,3031.22 2573.62,3020.84 2573.62,2704.62 2461,2592 2231,2592 2219.5,2580.5 2219.5,2554.83 2235.5,2538.83 2235.5,2458.5 2272,2422 2737,2422 2944,2215 2944,1899 P2.1@2855,1810
PA10: P2.2 U1.121 | length 2152.6
  Top Layer w10: U1.121@2730,3142.44 2791,3142.44 2800.56,3152 2871,3152 2887,3136 2887,3002 2953,2936 2953,2816 2965,2804 2997.17,2804 3075.17,2726 3146,2726 3146,2644 3040,2644 3006,2678 3006,2746.06 2928,2746.06 2918,2736.06 2918,2638 2911,2631 2911,2529 2881,2529 2786,2434 2786,1841 P2.2@2755,1810
PA11: R11.1 U1.122 | length 1754.9
  Top Layer w10: R11.1@1925,1930 v1(2001,1930) ; v1(2645,3146) 2661.13,3162.13 U1.122@2730,3162.13
  Layer 2 w10: v1(2001,1930) 2016.5,1945.5 2016.5,2329.5 1985.5,2360.5 1985.5,2621 2008.77,2644.27 2042.77,2644.27 2274.11,2875.61 2374.61,2875.61 v1(2645,3146)
PA12: R12.1 U1.123 | length 2050.9
  Top Layer w10: R12.1@1930,2075 v1(1977,2075) ; U1.123@2730,3181.81 2779.19,3181.81 v1(2780,3181)
  Layer 2 w10: v1(1977,2075) 1864,2188 1864,2656 1824,2696 1824,2766 1856,2798 1952,2798 2421,3267 2529,3267 2565,3231 2730,3231 v1(2780,3181)
PB2: J1.55 U1.58 U6.6 | length 6707.5
  Top Layer w10: v1(1639,4025) U6.6@1686.5,4025 ; v1(1975,2306) 2058.13,2389.13 U1.58@2058.13,2431.2
  Layer 2 w10: v1(1639,4025) 1548.5,3934.5 ; v1(1975,2306) 2000.5,2280.5 2000.5,2060.5 1903.5,1963.5 ; v1(2523,2774.02) 2483.5,2734.52 2192.02,2734.52 2020.5,2562.99 2020.5,2505.68 2068,2458.18 2068,1943 2013,1888 1979,1888 1903.5,1963.5 ; 1548.5,3934.5 1548,3934 1548,2026 1678,1896 1836,1896 1903.5,1963.5 ; 1548.5,3934.5 1548.5,2318.5 1903.5,1963.5
  Bottom Layer w10: v1(2523,2774.02) J1.55@2590,2774.02
PB6: J1.24 U1.164 U6.1 | length 3024.5
  Top Layer w10: v1(1313,4125) U6.1@1373.5,4125 ; v1(2015,3575) 2015,3532.62 2038.45,3509.17 U1.164@2038.45,3440.29
  Layer 1 w10: v1(1313,4125) 1312,4124 1312,4049.78 ; v1(1896,3743.33) 1618.45,3743.33 ; v1(2015,3575) 1962.53,3575 1936.53,3549 1812.78,3549 1618.45,3743.33 ; 1312,4049.78 1618.45,3743.33 ; 1312,4049.78 1312,4011 1579.67,3743.33 1618.45,3743.33
  Layer 2 w10: v1(1896,3743.33) 1896,3227 1916,3207 2199,3207 2317,3325 v1(2354,3325)
  Bottom Layer w10: v1(2354,3325) 2369.95,3340.95 J1.24@2404.96,3340.95
PB10: J2.2 U1.79 | length 1047.5
  Top Layer w10: U1.79@2471.52,2431.2 2471.52,2481.52 v1(2472,2482)
  Bottom Layer w10: v1(2472,2482) 2483,2471 2874.46,2471 3040.46,2637 3212.43,2637 3224.99,2649.57 J2.2@3390,2649.57
PB11: J2.1 U1.80 | length 1348
  Top Layer w10: v1(2491,2381) 2491.2,2381.2 U1.80@2491.2,2431.2
  Bottom Layer w10: v1(2491,2381) 2530.5,2420.5 3242.5,2420.5 3376,2554 3497,2554 3519,2576 3519,2624 3507.5,2635.5 3448,2635.5 3430.57,2618.07 J2.1@3390,2618.07
PC10: J1.40 U1.139 | length 248.2
  Top Layer w10: v1(2530,3291) 2530.57,3291.57 U1.139@2530.57,3440.29
  Bottom Layer w10: v1(2530,3291) 2530,3256.46 2540,3246.46 J1.40@2590,3246.46
PC12: J1.38 U1.141 | length 203.3
  Top Layer w10: v1(2485,3369.41) 2491.2,3375.61 U1.141@2491.2,3440.29
  Bottom Layer w10: v1(2485,3369.41) 2544.96,3309.45 J1.38@2590,3309.45
PD2: J1.37 U1.144 | length 738.9
  Top Layer w10: U1.144@2432.15,3440.29 2432.15,3153.71 v1(2458,3127.85)
  Bottom Layer w10: v1(2458,3127.85) 2458,3378 2480,3400 2494.95,3400 2554,3340.95 J1.37@2590,3340.95
PE2: J1.20 U1.1 | length 899.5
  Top Layer w10: v1(1671,3375) 1687.02,3358.98 U1.1@1720.91,3358.98
  Bottom Layer w10: v1(1671,3375) 1762,3284 1762,3232 1793.84,3200.16 2296.43,3200.16 2311.23,3214.96 J1.20@2404.96,3214.96
PE3: J1.19 U1.2 | length 1119.3
  Top Layer w10: U1.2@1720.91,3339.29 1770.71,3339.29 v1(1771,3339)
  Bottom Layer w10: v1(1771,3339) 1704,3406 1664,3406 1643,3385 1643,3363.75 1661.57,3345.18 1677.18,3345.18 1711,3311.36 1711,3231.5 1758.34,3184.16 1873.34,3184.16 1874.03,3183.47 J1.19@2404.96,3183.47
PE4: J1.18 U1.3 | length 1013.9
  Top Layer w10: v1(1620,3304) 1635.61,3319.61 U1.3@1720.91,3319.61
  Bottom Layer w10: v1(1620,3304) 1647,3277 1647,3177 1656,3168 1859,3168 1875.03,3151.97 J1.18@2404.96,3151.97
PE5: J1.17 U1.4 | length 785.3
  Top Layer w10: U1.4@1720.91,3299.92 1770.08,3299.92 v1(1809,3261)
  Layer 1 w10: v1(1809,3261) 1866,3261 2039,3088 v1(2287,3088)
  Bottom Layer w10: v1(2287,3088) 2319.47,3120.47 J1.17@2404.96,3120.47
PE6: J1.16 U1.5 | length 868.7
  Top Layer w10: v1(1671,3281) 1671.76,3280.24 U1.5@1720.91,3280.24
  Layer 1 w10: v1(1671,3281) 1677,3287 1872,3287 2047.5,3111.5 2299.5,3111.5 v1(2322,3089)
  Bottom Layer w10: v1(2322,3089) J1.16@2404.96,3088.98
PF6: U1.24 U6.7 | length 1409.2
  Top Layer w10: U6.7@1686.5,4075 v1(1724,4075) ; U1.24@1720.91,2906.22 1822,2906.22 v1(1838,2922.22)
  Layer 2 w10: v1(1724,4075) 1700,4051 1700,3012.22 1790,2922.22 v1(1838,2922.22)
PF7: U1.25 U6.3 | length 1590.5
  Top Layer w10: U6.3@1373.5,4025 v1(1433,4025) ; v1(1671,2887) 1671.46,2886.54 U1.25@1720.91,2886.54
  Layer 2 w10: v1(1433,4025) 1457,4049 1653.5,4049 1662.5,4040 1662.5,3497.82 1564.5,3399.82 1564.5,3185.5 1580.5,3169.5 1580.5,3008.72 1671,2918.22 v1(1671,2887)
PF8: U1.26 U6.5 | length 1320.9
  Top Layer w10: U6.5@1686.5,3975 v1(1731,3975) ; U1.26@1720.91,2866.85 1770.85,2866.85 v1(1771,2867)
  Layer 2 w10: v1(1731,3975) 1731,3194.5 1861.5,3064 1861.5,2912 1848.22,2898.72 1802.72,2898.72 v1(1771,2867)
PF9: U1.27 U6.2 | length 1504.6
  Top Layer w10: v1(1336,4075) U6.2@1373.5,4075 ; v1(1620,2847.17) U1.27@1720.91,2847.17
  Bottom Layer w10: v1(1336,4075) 1311,4050 1311,3156.17 v1(1620,2847.17)
PG3: J3.37 U1.107 | length 2104.4
  Top Layer w10: U1.107@2730,2866.85 v1(2780,2866.85) ; v1(4012.42,3983) 4021.85,3973.57 J3.37@4021.85,3890
  Bottom Layer w10: v1(2780,2866.85) 2872.85,2866.85 3222.92,3216.92 3222.92,3327 3260.33,3364.41 3260.33,3551.33 3409,3700 3881,3700 3925,3744 3925,3796 4012.42,3883.42 v1(4012.42,3983)
PG13: J1.33 U1.156 | length 727.3
  Top Layer w10: U1.156@2195.93,3440.29 v1(2195.93,3515)
  Layer 1 w10: v1(2195.93,3515) 2273.37,3515 2288.37,3530 2398,3530 2471,3457 2644,3457 2662,3475 v1(2697,3475)
  Bottom Layer w10: J1.33@2590,3466.93 2647.93,3466.93 v1(2697,3475)
PG14: J1.32 U1.157 | length 890.8
  Top Layer w10: v1(2176,3390) 2176.24,3390.24 U1.157@2176.24,3440.29
  Layer 1 w10: v1(2176,3390) 2176,3382 2200,3358 2250.19,3358 2259,3366.81 2343.81,3366.81 2413,3436 2635,3436 2681,3390 2704.5,3390 2722.5,3408 2722.5,3483.5 2704,3502 v1(2672.57,3502)
  Bottom Layer w10: J1.32@2590,3498.43 2669,3498.43 v1(2672.57,3502)
PH6: J2.8 J3.38 U1.83 | length 2762.2
  Top Layer w10: U1.83@2550.26,2431.2 2550.26,2481.26 v1(2566,2497) ; J3.38@4041.53,3890 4041.53,3814.47 v1(4042,3814)
  Bottom Layer w10: v1(2566,2497) 2566,2514 2592,2540 2701,2540 2737.06,2503.94 2835.49,2503.94 3170.04,2838.5 3260.5,2838.5 3260.54,2838.54 J2.8@3390,2838.54 3441,2838.54 3511,2908.54 3511,3553 3520,3562 3568,3562 3592.96,3586.96 3650,3586.96 3696.96,3540 4000,3540 4042,3582 v1(4042,3814)
PH7: J3.39 U1.84 | length 4368.7
  Top Layer w10: v1(2569.94,2349.06) U1.84@2569.94,2431.2 ; J3.39@4061.22,3890 4061.22,3920.22 v1(4085.5,3944.5)
  Layer 2 w10: v1(2569.94,2349.06) 2814,2105 2814,1735 2848,1701 3822,1701 4245,2124 4245,3785 v1(4085.5,3944.5)
PI3: J3.36 U1.134 | length 2032.8
  Top Layer w10: U1.134@2629,3440.29 2629,3508.59 2750.41,3630 v1(2783,3630) ; v1(4002,3817) 4002.16,3817.16 J3.36@4002.16,3890
  Layer 1 w10: v1(2783,3630) 2757.66,3630 2665.01,3722.64 2665.01,3810.01 2709,3854 3405.5,3854 3435.5,3824 3503,3824 3526,3847 3566,3847 3605,3808 3846,3808 3911,3873 3946,3873 v1(4002,3817)
PI8: J3.35 U1.7 | length 3631.6
  Top Layer w10: v1(1605,3240) 1695.15,3240 U1.7@1720.91,3240.87 ; J3.35@3982.48,3890 v1(3982.48,3931)
  Bottom Layer w10: v1(1605,3240) 1422,3423 1422,3741 1716.23,4035.23 1945.65,4035.23 2096,4185.57 3809.43,4185.57 3982.48,4012.52 v1(3982.48,3931)
RESET: C12.1 J1.10 J3.40 P1.5 R6.1 RST.1 U1.31 | length 8012.6
  Top Layer w10: v1(1620.8,2768.5) 1620.88,2768.42 v1@1621.26,2768.42 ; v1(1621.26,2768.5) 1621.34,2768.42 U1.31@1720.91,2768.42 ; R6.1@3730,2049.94 3730,2015 3760,1985 C12.1@3942.09,1985 3942.09,1870.91 ; RST.1@3882.91,1710 3942.09,1769.17 3942.09,1870.91 ; J3.40@4080.9,3890 v1@4080.9,3860 ; v1(4081,3849) 4080.9,3849.1 v1@4080.9,3860 ; 3942.09,1870.91 4142,1671 4224,1671 4262,1709 4262,3737 4139,3860 v1@4080.9,3860
  Layer 1 w10: v1(1620.8,2768.5) 1518.5,2768.5 1461,2826 1461,3049 1647,3235 1647,3296 1663,3312 2009.32,3312 2054.32,3357 2054.32,3544.87 2056.5,3547.06 2056.5,3743.5 2368,4055 P1.5@2615,4055 2780,3890 4040,3890 v1(4081,3849)
  Bottom Layer w10: v1(1621.26,2768.5) 1704.5,2768.5 1748,2812 1795.98,2812 1803.48,2804.5 1861.52,2804.5 1957.02,2900 J1.10@2404.96,2900
VBAT: D1.2 J1.29 | length 1035.4
  Top Layer w10: D1.2@1477.6,3731.26 1477.6,3711.4 v1(1493.6,3695.4)
  Bottom Layer w10: v1(1493.6,3695.4) 1536,3653 2155,3653 2228.34,3579.66 2285.88,3579.66 2367.11,3498.43 J1.29@2404.96,3498.43
VCC: R16.2 R20.2 R21.2 | length 2066.4
  Top Layer w10: R21.2@2415,3555 2486,3555 2627,3696 R20.2@2635,3725 v1(2698.5,3725) ; R16.2@4210,3520 v1(4210,3701)
  Layer 1 w10: v1(2698.5,3725) 2722.5,3701 v1(4210,3701)
VCC3.3: 3.3V.1 C31.2 C32.2 C37.2 C38.2 C39.2 C40.2 C41.2 C42.2 C43.2 C44.1 C45.1 MOS1.2 P1.4 R6.2 R8.1 R9.1 R17.1 R18.2 R19.1 U2.5 U3.1 U3.3 U3.9 U3.14 U3.27 U3.43 U3.49 U5.8 U6.8 WKUP.2 | length 12086.8
  Top Layer w10: R9.1@1475,3829.94 1440,3829.94 ; C44.1@1925,4065 1936,4109.5 2318,4109.5 2357.5,4070 2373,4070 ; U2.5@2265,1729.8 2296,1729.8 2309,1742.8 2309,1888 2320,1899 2445,1899 C31.2@2445,1940 ; R8.1@2310,2140 v1(2310,2073) 2310,2029 2329,2010 2419,2010 2445,1984 C31.2@2445,1940 ; v1(2502,3792) 2529,3792 2545,3808 C45.1@2545,3840 2545,4032 2507,4070 2492,4070 ; C32.2@2545,1930 2500,1930 2490,1940 C31.2@2445,1940 ; P1.4@2715,4055 2670,4100 2522,4100 2492,4070 ; v1(2912,3546) 2938,3520 R17.1@2975,3520 2975,3420 3044,3351 3044,3344 3053,3335 3116,3335 3116,3238 3059,3181 3059,3035 R18.2@3095,3035 ; C39.2@3095,2845 R18.2@3095,3035 ; v1(3152,2135.4) v1@3152.4,2141 ; MOS1.2@3152.4,2170.79 v1@3152.4,2141 ; U3.27@3371.06,2730 3360,2730 3314,2776 3314,2912 3337,2935 3374.94,2935 R19.1@3374.94,2965 ; WKUP.2@3447.91,1730 3390,1787.91 3390,2011 ; U3.14@3780.51,2730 3780.51,2784.12 ; v1(3780.51,2816) 3780.51,2784.12 ; R6.2@3820,2049.94 3820,2075 ; v1(3937.99,2846) U3.9@3937.99,2730 3937.99,2482.49 ; C43.2@4015.06,2970 3947,2970 3942,2965 C42.2@3875,2965 3812,2965 3802,2975 C41.2@3740.04,2975 3740.04,3008 3732.1,3015.94 3392,3015.94 3374.94,2998.87 ; U3.49@4032.48,2257.56 4032.48,2304.52 3937.99,2399.01 3937.99,2482.49 ; U3.3@4126.97,2730 4126.97,2788.94 4160,2821.97 4167.99,2821.97 4189.96,2800 ; v1@4126.97,2877 v1(4126.97,2877.27) ; v1(4133.96,2877) 4189.96,2821 4189.96,2800 ; U3.1@4189.96,2730 4189.96,2800 ; 1389,3581 1389,3778.94 1440,3829.94 ; 1389,3581 1389,3554 3.3V.1@1335,3500 1335,3527 1389,3581 ; 1389,3581 1440,3632 1440,3829.94 ; 1440,3829.94 1440,3855 1537,3952 1605,3952 1613,3960 1613,4074 1664,4125 U6.8@1686.5,4125 2318,4125 2373,4070 ; 2373,4070 U5.8@2430,4070 2492,4070 ; R18.2@3095,3035 3347.94,3035 3374.94,2998.87 ; v1@3152.4,2141 3048,2141 3041,2166 2996,2211 2924,2211 2924,2133 2937,2120 2937,2038 2976,1999 3381,1999 C38.2@3390,2040 3390,2011 ; R19.1@3374.94,2965 3374.94,2998.87 ; R19.1@3374.94,2965 3411,2965 3501,2875 C40.2@3555,2875 3673,2875 3704,2844 3720.63,2844 3780.51,2784.12 ; 3390,2011 3424,1977 3560.53,1977 3599.53,2016 C37.2@3599.53,2050 3657,2050 3743,2136 3759,2136 3820,2075 ; 3820,2075 3820,2141 3843.5,2164.5 U3.43@3843.5,2257.56 3843.5,2388 3937.99,2482.49
  Layer 1 w10: v1(2502,3792) 2638.5,3655.5 2678.26,3655.5 2787.76,3546 v1(2912,3546) ; v1(4126.97,2877.27) 3969.26,2877.27 v1(3937.99,2846) 4102.96,2846 v1(4133.96,2877)
  Bottom Layer w10: v1(2310,2073) 3089.6,2073 v1(3152,2135.4) ; v1(3780.51,2816) 3833.51,2763 3920,2763 3938,2781 v1(3937.99,2846)
  other v1: 3938,2846
VCC3.3M: C13.2 C14.2 C15.2 C16.2 C17.2 C18.2 C19.2 C20.2 C21.2 C22.2 C23.2 C24.2 C25.2 C26.2 C27.2 D1.1 R3.2 R5.2 R8.2 R9.2 U1.15 U1.23 U1.36 U1.49 U1.62 U1.72 U1.82 U1.91 U1.103 U1.114 U1.127 U1.136 U1.149 U1.159 U1.172 | length 12309.1
  Top Layer w10: v1(1350,2208) R3.2@1350,2255 ; D1.1@1552.4,3731.26 1552.4,3774 1565,3786.6 R9.2@1565,3829.94 1757.06,3829.94 1812,3775 R5.2@1844.94,3775 1844.94,3770 1816,3770 1808,3762 1808,3649 1866,3591 1866,3490.97 1880.97,3476 U1.172@1880.97,3440.29 1880.97,3396 1915,3376 1915,3263 1952,3226 1974,3226 2005,3257 2120.72,3257 2169.72,3208 2185.72,3208 2333.72,3356 v1(2333.72,3390.31) U1.149@2333.72,3440.29 ; C13.2@1554.94,3254.94 1554.94,3204.06 1560,3199 C14.2@1560,3150 1560,3064 1604.5,3019.5 ; C15.2@1575,2810 1575,2864.81 1636.09,2925.91 1654.59,2925.91 ; v1(1604.5,2925.5) 1604.5,2976 ; U1.36@1720.91,2670 v1(1790,2670) v1(1808,2670) ; U1.23@1720.91,2925.91 1654.59,2925.91 ; U1.15@1720.91,3083.39 1655.39,3083.39 1604.5,3019.5 ; v1(1895,1879) C27.2@1895,1775 2088,1775 ; v1(1896.97,2516.08) 1880.97,2500.08 U1.49@1880.97,2431.2 1880.97,2339.03 1964,2256 2111,2256 2111,2156 2137,2130 2137,1824 2088,1775 ; U1.62@2136.87,2431.2 2136.87,2415 2137,2414.87 C16.2@2137,2330 ; v1@2136.87,3391 v1(2136.87,3391.13) ; U1.159@2136.87,3440.29 v1(2136.87,3391.13) ; v1(2137,3391) v1(2136.87,3391.13) ; U1.72@2333.72,2431.2 2333.72,2390.23 2357.22,2366.73 2357.22,2324.22 ; C17.2@2405,2335 2368,2335 2357.22,2324.22 ; C18.2@2530.06,2265 2593,2265 2598,2260 C19.2@2635,2260 2635,2292 2568.94,2303 2532,2339.94 2532,2405.57 U1.82@2530.57,2431.2 2530.57,2528 2554.46,2551.89 U1.91@2730,2551.89 2793,2551.89 2806.11,2565 C20.2@2870,2565 2870,2635 2875,2640 C21.2@2875,2710.06 2875,2752 ; U1.136@2589.63,3440.29 2589.63,3506.63 ; v1(2630,3574) 2589.63,3533.63 2589.63,3506.63 ; v1(2645.12,2972.65) 2645.12,2988.65 2661.12,3004.65 U1.114@2730,3004.65 2762,3004.65 2762,3001 2772.5,3001 2773,3000.5 2792,3000.5 2804,3012.5 2804,3050 C22.2@2840,3050 2840,3021.05 2886.38,2974.67 2886.38,2848.59 2875,2837.21 ; U1.103@2730,2788.11 2825.9,2788.11 2875,2837.21 ; U1.127@2730,3260.55 v1(2779.98,3260.55) ; v1(2797.5,3406.06) 2813.5,3390.06 C23.2@2845,3390.06 2845,3616 2803,3658 ; C24.2@2920,3850 C25.2@2815.06,3850 2789,3850 2779,3840 2779,3682 2803,3658 ; C26.2@3110,2685 3080,2696.99 3008.99,2768 2891,2768 2875,2752 ; 1604.5,2976 1604.5,3019.5 ; 1604.5,2976 1654.59,2925.91 ; 2088,1775 2136,1775 2180,1819 2180,2083 2235,2138 2235,2193 2272,2230 ; C16.2@2137,2330 C16.2@2142,2325 ; C16.2@2137,2330 2137,2325 C16.2@2142,2325 ; C16.2@2142,2325 2192.18,2274.82 2235,2274.82 ; C16.2@2142,2325 C16.2@2160,2325 2214,2325 2235,2304 2235,2274.82 ; 2235,2274.82 2235,2267 2272,2230 ; 2235,2274.82 2329.82,2274.82 2357,2302 ; 2272,2230 R8.2@2310,2230 2336,2230 2357,2251 2357,2302 ; 2357,2302 2357,2324 2357.22,2324.22 ; 2357,2302 2357.22,2302.22 2357.22,2324.22 ; 2589.63,3506.63 2741,3658 2803,3658 ; 2875,2752 2875,2837.21
  Layer 1 w10: v1(1350,2208) 1602,1956 1818,1956 v1(1895,1879) ; v1(2137,3391) 2160,3414 2310.04,3414 v1(2333.72,3390.31)
  Layer 2 w10: v1(1604.5,2925.5) 1645,2885 1645,2720 1695,2670 v1(1790,2670) ; v1(1808,2670) 1808,2837 1824,2853 1978,2853 2378,3253 2378,3339 2368,3349 2316,3349 2283.5,3316.5 2211.5,3316.5 v1(2136.87,3391.13) ; v1(2333.72,3390.31) 2333.72,3435.72 2453,3555 2611,3555 v1(2630,3574) ; v1(2779.98,3260.55) 2804,3284.57 2804,3399.56 v1(2797.5,3406.06)
  Bottom Layer w10: v1(1790,2670) 1746.5,2626.5 1746.5,2544 1759.5,2531 1882.04,2531 v1(1896.97,2516.08) ; v1(2645.12,2972.65) 2654,2981.52 2654,3056 2670,3072 2708,3072 2804,3168 2804,3236.53 v1(2779.98,3260.55)
VCC5: 5V.1 C33.1 F1.1 J1.58 J1.59 J1.60 J3.2 USB.1 | length 7037.3
  Top Layer w10: v1(1335,3639) 5V.1@1335,3680 1289,3726 1289,4144 1298,4153 3232,4153 3275,4110 3275,3872 3296,3851 3320.87,3851 3332.87,3863 J3.2@3332.87,3890 ; USB.1@1514,1921.18 v1(1568.9,1921.18) ; v1(1840,2257) C33.1@1840,2190 1840,2150 1845,2145 2055.23,2145 2088.23,2112 F1.1@2088.23,1925 v1(2088.23,1841)
  Layer 1 w10: v1(1568.9,1921.18) 1545,1897.28 1545,1852 1556,1841 v1(2088.23,1841)
  Layer 2 w10: v1(1335,3639) 1393,3581 1393,2097.08 v1(1568.9,1921.18)
  Bottom Layer w10: v1(1840,2257) 2009.5,2257 2120.5,2368 2120.5,2485.5 2222.58,2587.58 2475.58,2587.58 2504.54,2616.54 J1.60@2590,2616.54 J1.59@2590,2648.03 J1.58@2590,2679.53
VCC_LED: C34.1 MOS1.3 R10.1 R15.2 | length 1397.8
  Top Layer w10: R15.2@2750,2260 v1(2750,2308) ; C34.1@2960,2440 3075,2440 3115,2400 MOS1.3@3115,2269.21 v1(3045,2269.21) ; R10.1@3340,1725 v1(3340,1773)
  Layer 1 w10: v1(2750,2308) 3006.21,2308 v1(3045,2269.21)
  Layer 2 w10: v1(3045,2269.21) 3045,2068 v1(3340,1773)
VDDA: C6.2 C7.2 R2.2 R3.1 U1.39 | length 685.7
  Top Layer w10: R3.1@1350,2345 1418,2345 1434,2329 1575,2329 ; C6.2@1590,2265 1590,2307 1575,2329 ; U1.39@1720.91,2610.94 1647.45,2610.94 1575,2538.49 R2.2@1575,2475 C7.2@1575,2365 1575,2329
VREF+: J1.2 R13.1 | length 1252.9
  Top Layer w10: v1(2855,2117) R13.1@2855,2170
  Layer 2 w10: v1(2323.03,2648.03) 2304,2629 2213,2629 2181,2597 2181,2466 2242,2405 2550,2405 2602,2353 2602,2344 2829,2117 v1(2855,2117)
  Bottom Layer w10: v1(2323.03,2648.03) J1.2@2404.96,2648.03
pads on no net: J1.11 J1.12 J1.13 J1.14 J1.48 J1.49 J1.50 J1.51 J1.52 J1.53 J1.54 J2.4 J2.5 J2.6 J2.7 J2.9 J2.10 J2.11 J2.12 J2.13 J2.14 J2.15 J2.21 J2.22 J2.23 J2.26 J2.27 J2.28 J2.29 J2.30 J2.32 J2.33 J2.34 J2.35 J2.36 J2.37 J2.38 J2.39 J2.40 J2.41 J2.42 J2.43 J2.44 J2.45 J2.46 J2.47 J2.48 J2.49 J2.50 J2.51 J2.52 J2.53 J2.54 J2.55 J2.56 J2.57 J2.58 J2.59 J2.60 U1.53 U1.54 U1.55 U1.92 U1.93 U1.94 U1.95 U1.101 U3.40 U4.1 U4.2 U4.3 U4.4 U4.5 U4.6 U4.10 U4.11 U4.14 U4.15 U4.20 U4.21 U4.22 U4.23 U4.24 U4.25 U4.26 U4.27 U4.28 U4.33 U4.34 U4.35 U4.38 U4.39 U4.40 U4.45 U4.46 U4.47 U4.48 U6.9 USB.4

## Text inside footprints (layer, text, board x,y; h text height)
J3: Top Overlay "1" at 3309.19,3831 h30; Top Overlay "40" at 4057.19,3827 h30